# Altium PCB PCB Radio.PcbDoc
Units mm, origin at the board's own origin, x right, y up, seen from the top; angles counter-clockwise.
Board outline 152.4 x 101.6 mm, 4 copper layers (Top Layer, Layer 1, Layer 2-g, Bottom Layer), stack 1.641 mm thick; 3 components, 3 nets, 154 pads, 0 vias.
Unrouted connection lines stored in the file: 9.
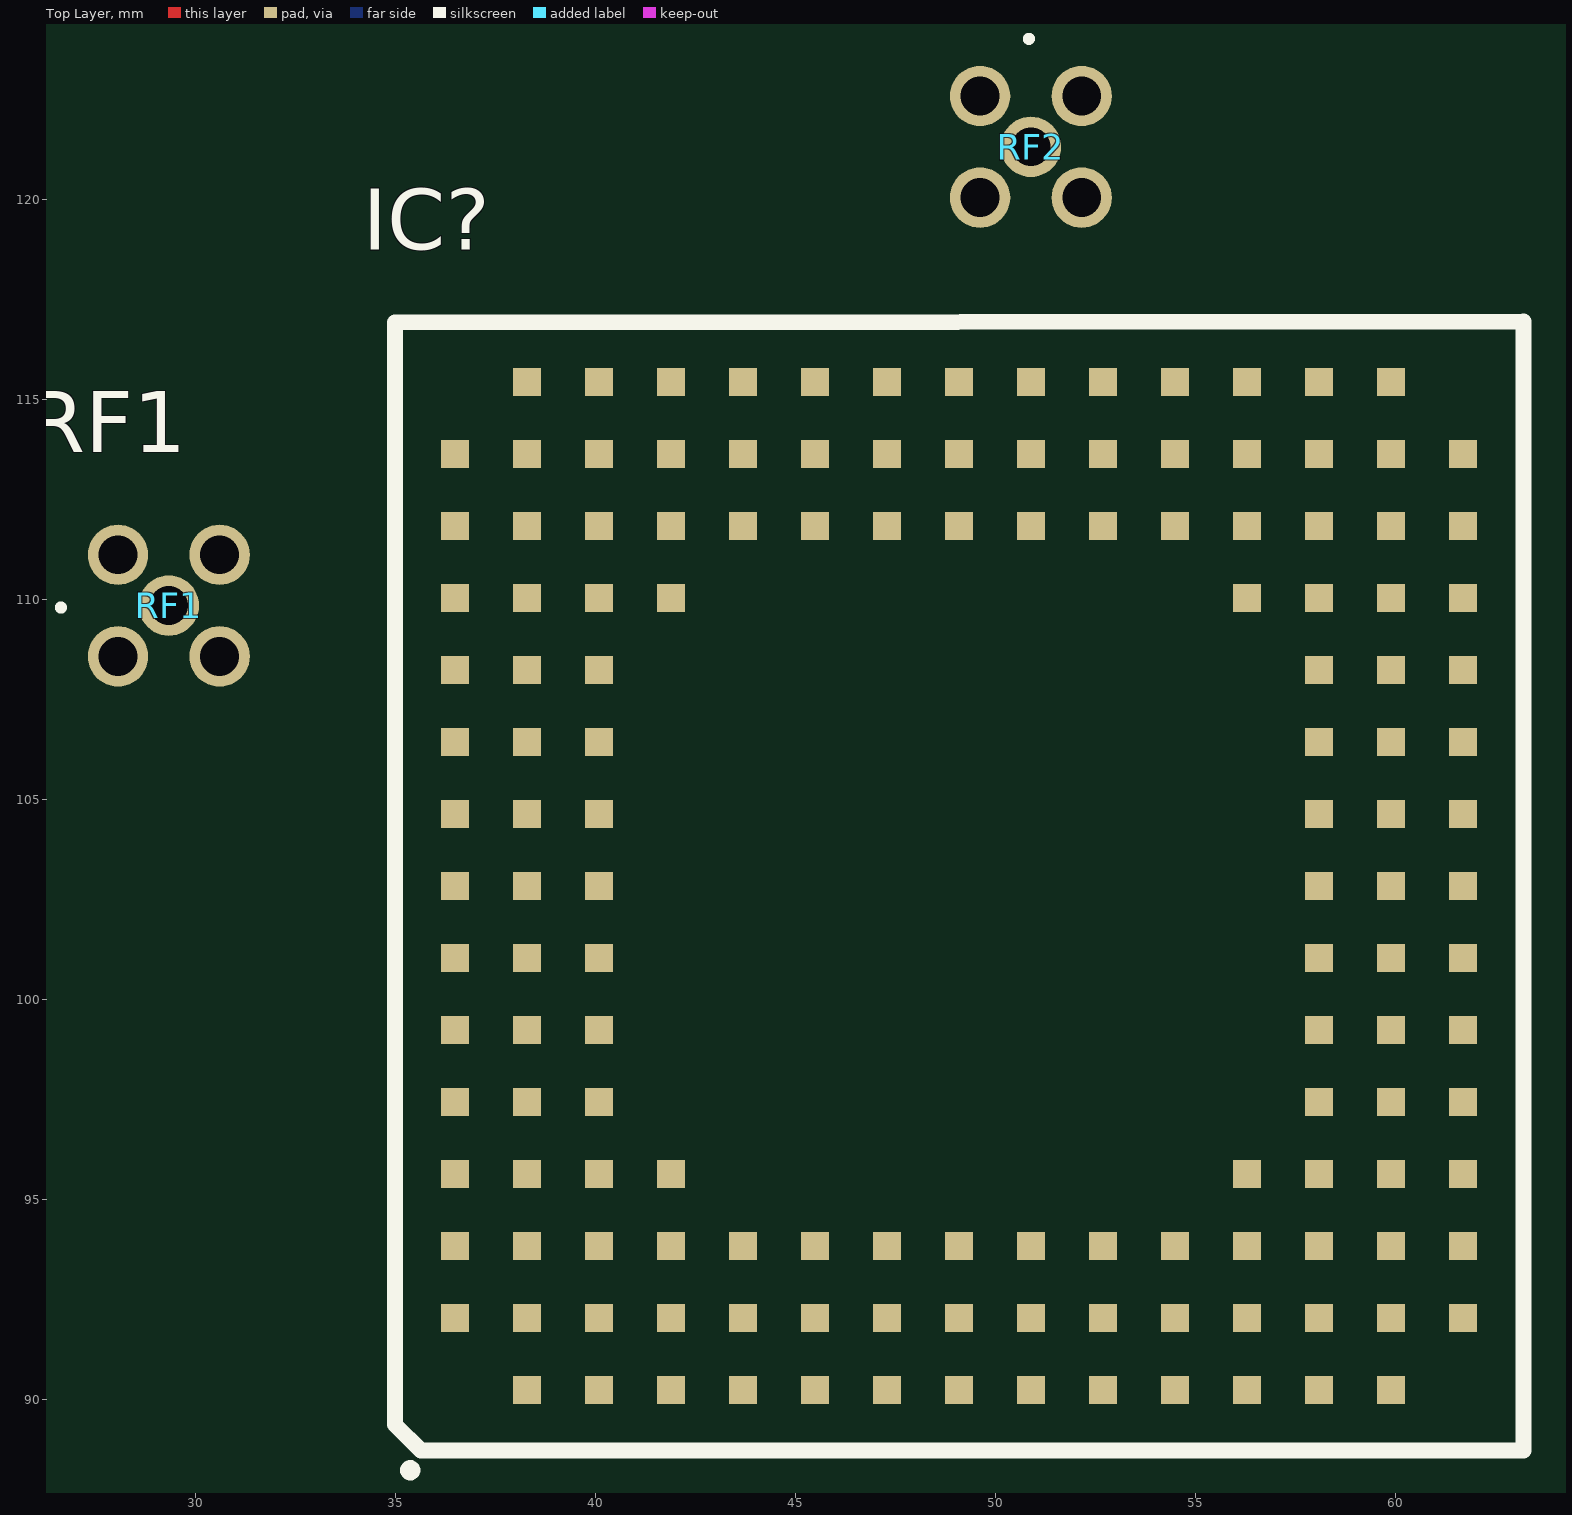
[diagram p0: Top Layer view]
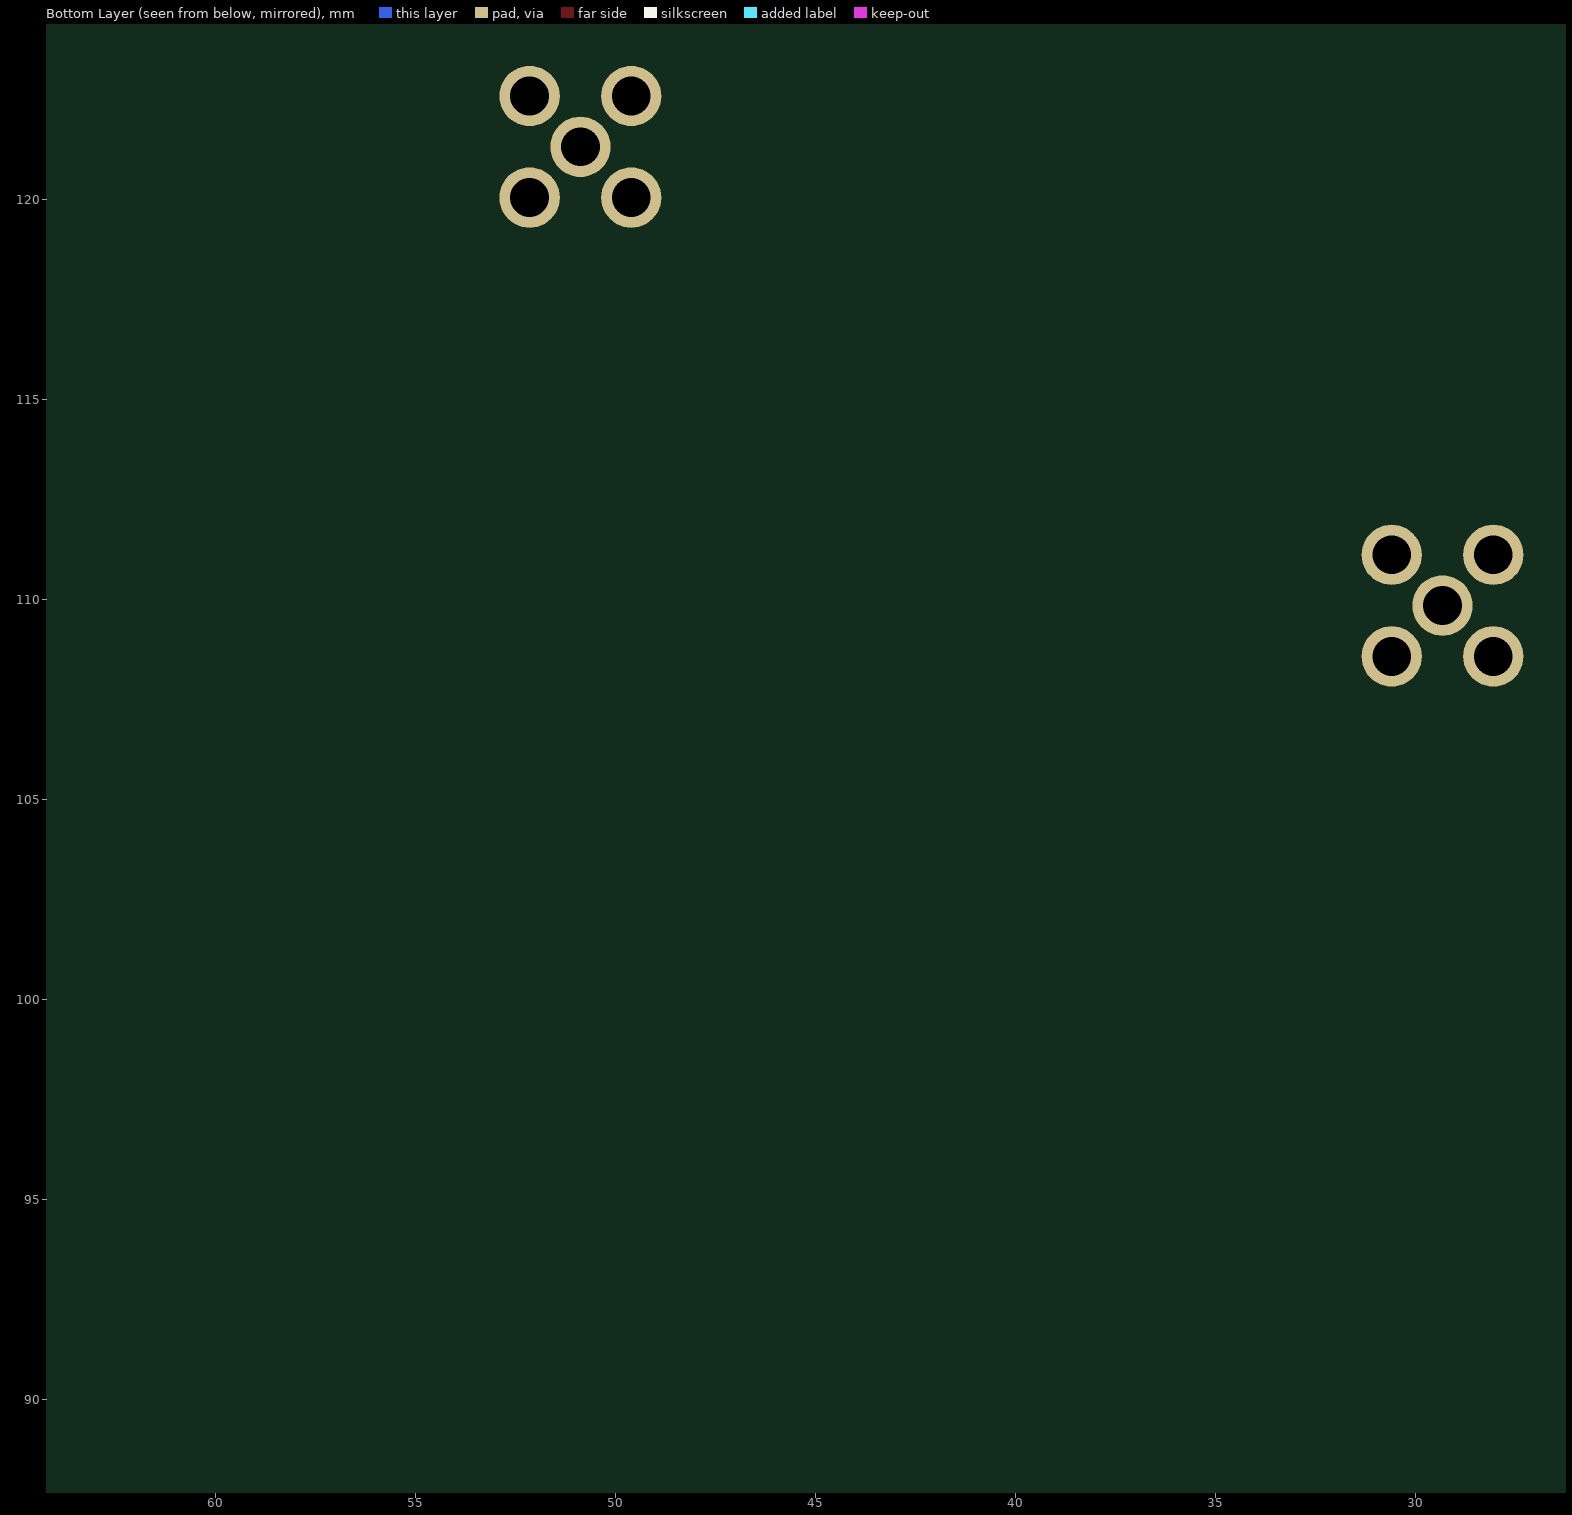
[diagram p1: Bottom Layer view, seen from below]

## Layer stack, top to bottom
Top Solder: solder mask 0.0102, Solder Resist, Dk 3.5
Top Layer: signal copper 0.0356
Dielectric 2: prepreg 0.2, PP-006, Dk 4.6
Layer 1: signal copper 0.035
Dielectric 1: dielectric 1.1, FR-4, Dk 4.8
Layer 2-g: signal copper 0.035
Dielectric 3: prepreg 0.2, PP-006, Dk 4.6
Bottom Layer: signal copper 0.0356
Bottom Solder: solder mask 0.0102, Solder Resist, Dk 3.5

## Board outline
25.4,25.4 177.8,25.4 177.8,127 25.4,127

## Design rules (kind name [scope] priority, off if disabled: settings)
Clearance [All] p1: gap=0.254 ignorepadtopadclearanceinfootprint=FALSE except(0: Arc-Hole Track-Hole SMDPad-Hole THPad-Hole Via-Hole Fill-Hole Poly-Hole Region-Hole Text-Hole)
PolygonConnect [All] p1: connectstyle=Relief reliefconductorwidth=0.254 reliefentries=4 polygonreliefangle="90 Angle" airgapwidth=0.254
RoomDefinition temp [InComponentClass('temp')] p1: confinementstyle=ConfineIn formatcopy=TRUE lockcomponents=FALSE outline 25.361,69.779 93.455,69.779 93.455,127.029 25.361,127.029
RoutingVias [All] p1: holewidth=0.711 width=1.27 viastyle="Through Hole" minholewidth=0.711 minwidth=1.27 maxholewidth=0.711 maxwidth=1.27
SolderMaskExpansion [All] p1: expansion=0.102 istentingtop=FALSE
Width [All] p1: maxlimit=2 minlimit=0.254 preferedwidth=0.254 midlayer1_maxwidth=0.254 midlayer2_maxwidth=0.254 minimp=50.000000 maximp=50.000000 favimp=50.000000
30 further rules are at their usual default settings.

## Components (designator, comment, footprint, x,y, rotation, side; value= is the part's Value field where it differs from the comment)
IC? "ME910G1W101T010100" ME910G1 49.088,102.843 r90 top
RF1 "MMCX Connector Receptacle, Female Socket 50Ohm Through Hole, Right Angle Solder" 0734151001 29.337,109.855 r180 top
RF2 "MMCX Connector Receptacle, Female Socket 50Ohm Through Hole, Right Angle Solder" 0734151001 50.888,121.324 r90 top

## Footprints (in the part's own frame and the unit in brackets; to place one, negate y for a bottom-side part, rotate by r counter-clockwise, add the part's x,y. Pads: shape width x height; smd on the part's side, far side on the other; paste and mask are expansions set on the pad)
0734151001 [mm]
  round 1.509 hole 0.97: 1(0,0) 2(1.27,-1.27) 3(1.27,1.27) 4(-1.27,1.27) 5(-1.27,-1.27)
  silkscreen extent 2.65,0 2.75,0.1, body extent -1.75,-1.75 1.75,1.75, height 4.01
ME910G1 [mm] "ME910G1-Wx CAT M1/NB2 Module"
  rect 0.7x0.7 smd: A2(-12.6,10.8) A3(-12.6,9) A4(-12.6,7.2) A5(-12.6,5.4) A6(-12.6,3.6) A7(-12.6,1.8) A8(-12.6,0) A9(-12.6,-1.8) A10(-12.6,-3.6) A11(-12.6,-5.4) A12(-12.6,-7.2) A13(-12.6,-9) A14(-12.6,-10.8) B1(-10.8,12.6) B2(-10.8,10.8) B3(-10.8,9) B4(-10.8,7.2) B5(-10.8,5.4) B6(-10.8,3.6) B7(-10.8,1.8) B8(-10.8,0) B9(-10.8,-1.8) B10(-10.8,-3.6) B11(-10.8,-5.4) B12(-10.8,-7.2) B13(-10.8,-9) B14(-10.8,-10.8) B15(-10.8,-12.6) C1(-9,12.6) C2(-9,10.8) C3(-9,9) C4(-9,7.2) C5(-9,5.4) C6(-9,3.6) C7(-9,1.8) C8(-9,0) C9(-9,-1.8) C10(-9,-3.6) C11(-9,-5.4) C12(-9,-7.2) C13(-9,-9) C14(-9,-10.8) C15(-9,-12.6) D1(-7.2,12.6) D2(-7.2,10.8) D3(-7.2,9) D4(-7.2,7.2) D12(-7.2,-7.2) D13(-7.2,-9) D14(-7.2,-10.8) D15(-7.2,-12.6) E1(-5.4,12.6) E2(-5.4,10.8) E3(-5.4,9) E13(-5.4,-9) E14(-5.4,-10.8) E15(-5.4,-12.6) F1(-3.6,12.6) F2(-3.6,10.8) F3(-3.6,9) F13(-3.6,-9) F14(-3.6,-10.8) F15(-3.6,-12.6) G1(-1.8,12.6) G2(-1.8,10.8) G3(-1.8,9) G13(-1.8,-9) G14(-1.8,-10.8) G15(-1.8,-12.6) H1(0,12.6) H2(0,10.8) H3(0,9) H13(0,-9) H14(0,-10.8) H15(0,-12.6) J1(1.8,12.6) J2(1.8,10.8) J3(1.8,9) J13(1.8,-9) J14(1.8,-10.8) J15(1.8,-12.6) K1(3.6,12.6) K2(3.6,10.8) K3(3.6,9) K13(3.6,-9) K14(3.6,-10.8) K15(3.6,-12.6) L1(5.4,12.6) L2(5.4,10.8) L3(5.4,9) L13(5.4,-9) L14(5.4,-10.8) L15(5.4,-12.6) M1(7.2,12.6) M2(7.2,10.8) M3(7.2,9) M4(7.2,7.2) M12(7.2,-7.2) M13(7.2,-9) M14(7.2,-10.8) M15(7.2,-12.6) N1(9,12.6) N2(9,10.8) N3(9,9) N4(9,7.2) N5(9,5.4) N6(9,3.6) N7(9,1.8) N8(9,0) N9(9,-1.8) N10(9,-3.6) N11(9,-5.4) N12(9,-7.2) N13(9,-9) N14(9,-10.8) N15(9,-12.6) P1(10.8,12.6) P2(10.8,10.8) P3(10.8,9) P4(10.8,7.2) P5(10.8,5.4) P6(10.8,3.6) P7(10.8,1.8) P8(10.8,0) P9(10.8,-1.8) P10(10.8,-3.6) P11(10.8,-5.4) P12(10.8,-7.2) P13(10.8,-9) P14(10.8,-10.8) P15(10.8,-12.6) R2(12.6,10.8) R3(12.6,9) R4(12.6,7.2) R5(12.6,5.4) R6(12.6,3.6) R7(12.6,1.8) R8(12.6,0) R9(12.6,-1.8) R10(12.6,-3.6) R11(12.6,-5.4) R12(12.6,-7.2) R13(12.6,-9) R14(12.6,-10.8)
  silkscreen extent -14.73,-14.11 14.11,14.1, body extent -14.1,-14.1 14.1,14.1, height 2.65

## Part data
IC?: "Integrated Circuit", Manufacturer_Name="Telit Wireless Solutions", Arrow Part Number=ME910G1W101T010100, Arrow Price/Stock=https://www.arrow.com/en/products/me910g1w101t010100/telit, Datasheet Link=https://y1cj3stn5fbwhv73k0ipk1eg-wpengine.netdna-ssl.com/wp-content/uploads/2021/03/Telit_ME910G1_Hardware_Design_Guide_r8.pdf, Height=2.55mm, Manufacturer_Part_Number=ME910G1W101T010100, Supplier 1="Arrow Electronics", Supplier Part Number 1=ME910G1W101T010100
RF1 RF2: library part 0734151001, Supplier Part Number 1=WM5552-ND, Supplier 1=Digi-Key

## Nets (pads, with @x,y where several pads share a name; then routed paths per layer and width w, separated by ;. In a path a pad name is that pad's centre, name@x,y a point inside that pad or via, vN(x,y) a via of type N, cw(c..) or ccw(c..) an arc to the next point about the centre after c; other vN are vias at no path point)
GND: RF1.2 RF1.3 RF1.4 RF1.5 RF2.2 RF2.3 RF2.4 RF2.5
NetIC?_K1: IC?.K1 RF1.1
NetIC?_R9: IC?.R9 RF2.1
pads on no net: IC?.A2 IC?.A3 IC?.A4 IC?.A5 IC?.A6 IC?.A7 IC?.A8 IC?.A9 IC?.A10 IC?.A11 IC?.A12 IC?.A13 IC?.A14 IC?.B1 IC?.B2 IC?.B3 IC?.B4 IC?.B5 IC?.B6 IC?.B7 IC?.B8 IC?.B9 IC?.B10 IC?.B11 IC?.B12 IC?.B13 IC?.B14 IC?.B15 IC?.C1 IC?.C2 IC?.C3 IC?.C4 IC?.C5 IC?.C6 IC?.C7 IC?.C8 IC?.C9 IC?.C10 IC?.C11 IC?.C12 IC?.C13 IC?.C14 IC?.C15 IC?.D1 IC?.D2 IC?.D3 IC?.D4 IC?.D12 IC?.D13 IC?.D14 IC?.D15 IC?.E1 IC?.E2 IC?.E3 IC?.E13 IC?.E14 IC?.E15 IC?.F1 IC?.F2 IC?.F3 IC?.F13 IC?.F14 IC?.F15 IC?.G1 IC?.G2 IC?.G3 IC?.G13 IC?.G14 IC?.G15 IC?.H1 IC?.H2 IC?.H3 IC?.H13 IC?.H14 IC?.H15 IC?.J1 IC?.J2 IC?.J3 IC?.J13 IC?.J14 IC?.J15 IC?.K2 IC?.K3 IC?.K13 IC?.K14 IC?.K15 IC?.L1 IC?.L2 IC?.L3 IC?.L13 IC?.L14 IC?.L15 IC?.M1 IC?.M2 IC?.M3 IC?.M4 IC?.M12 IC?.M13 IC?.M14 IC?.M15 IC?.N1 IC?.N2 IC?.N3 IC?.N4 IC?.N5 IC?.N6 IC?.N7 IC?.N8 IC?.N9 IC?.N10 IC?.N11 IC?.N12 IC?.N13 IC?.N14 IC?.N15 IC?.P1 IC?.P2 IC?.P3 IC?.P4 IC?.P5 IC?.P6 IC?.P7 IC?.P8 IC?.P9 IC?.P10 IC?.P11 IC?.P12 IC?.P13 IC?.P14 IC?.P15 IC?.R2 IC?.R3 IC?.R4 IC?.R5 IC?.R6 IC?.R7 IC?.R8 IC?.R10 IC?.R11 IC?.R12 IC?.R13 IC?.R14

## Other copper
Top Layer:
  text "Design Notes: / FR-4 / Traces to RF1, RF2 Impedance Matched to 50 OHM / Er=4.6 +/-0.4 @1GHz / copper is 0.035 mm thick / Trace width is 1.1 mm" at 18.288,144.272 h1.52